# Altium PCB 电路板.PcbDoc
Units mil, origin at the board's own origin, x right, y up, seen from the top; angles counter-clockwise.
Board outline 1220.03 x 720.03 mil, 2 copper layers (Top Layer, Bottom Layer); 8 components, 7 nets, 28 pads, 5 vias.
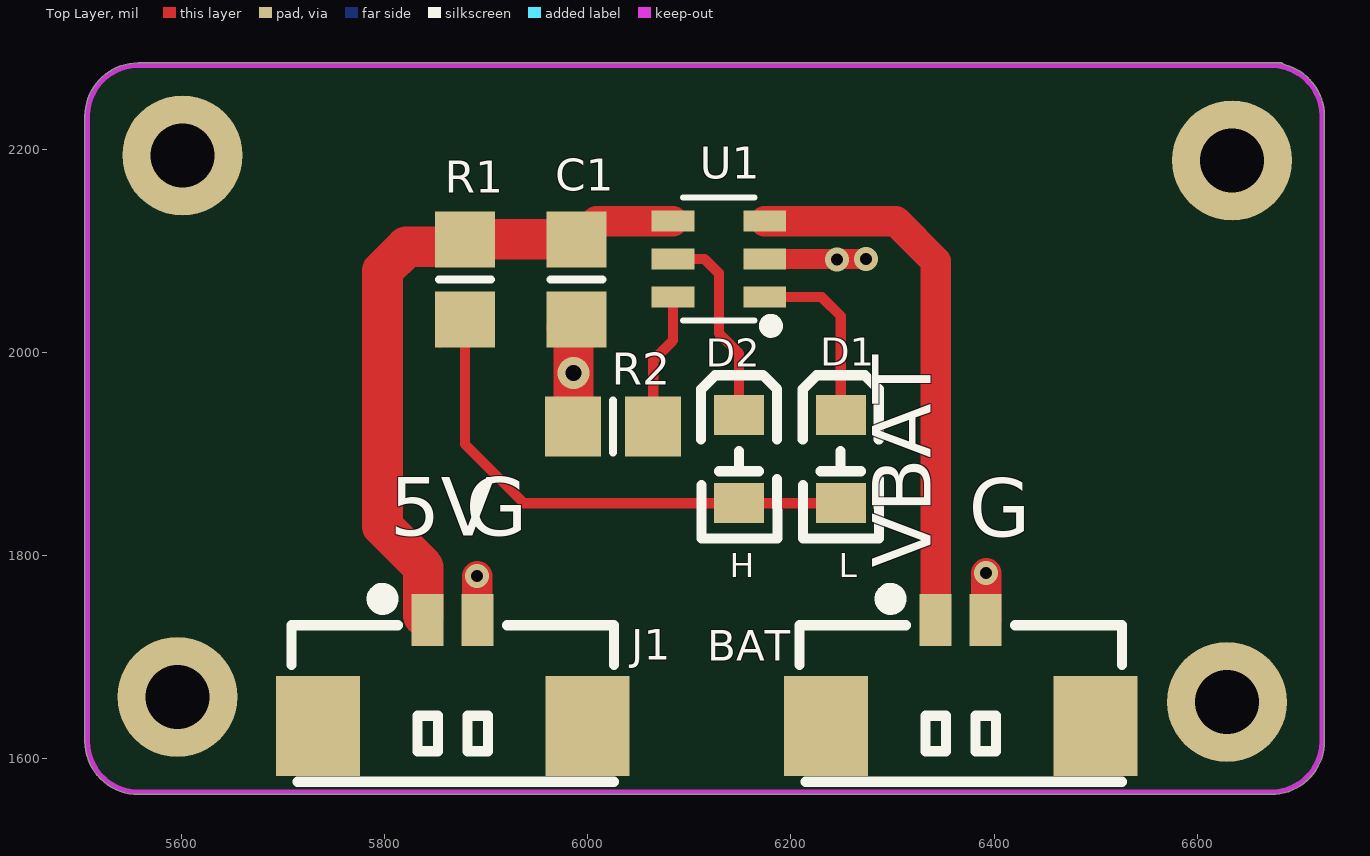
[diagram p0: Top Layer view]
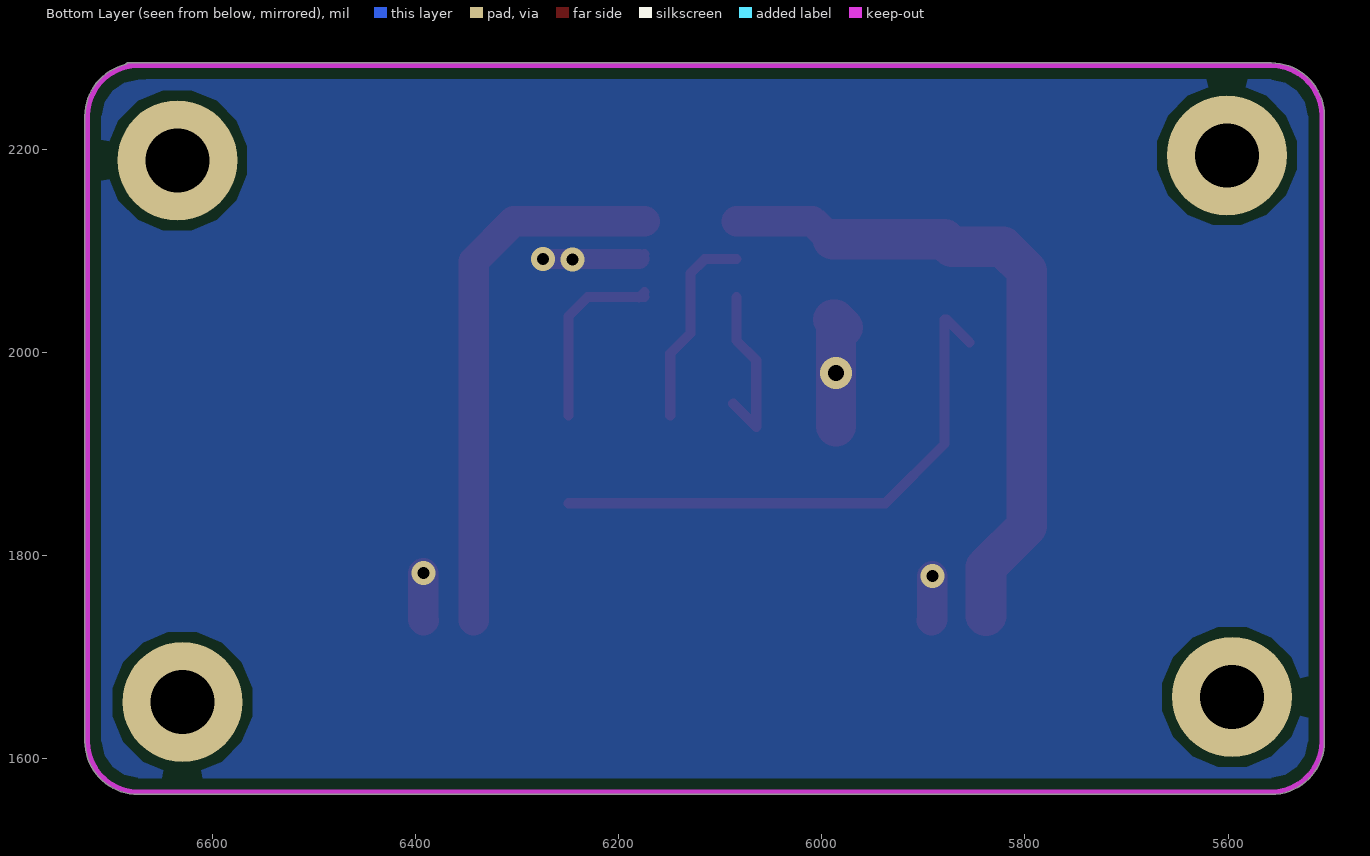
[diagram p1: Bottom Layer view, seen from below]

## Layer stack, top to bottom
Top Solder: solder mask 0.4, Solder Resist, Dk 3.5
Top Layer: signal copper 1.4
Dielectric 1: dielectric 12.6, FR-4, Dk 4.8
Bottom Layer: signal copper 1.4
Bottom Solder: solder mask 0.4, Solder Resist, Dk 3.5

## Board outline
5505.06,1617.58 ccw(c5557.57,1617.58) 5557.52,1565.06 ccw(c5557.55,1577.84) 5557.57,1565.06 cw(c5557.55,1567.4) 5557.52,1565.06 5557.57,1565.06 6672.57,1565.06 ccw(c6672.57,1617.57) 6725.09,1617.57 6725.09,2232.58 ccw(c6672.57,2232.58) 6684.84,2283.64 ccw(c6682.56,2282.57) 6682.56,2285.09 6667.51,2285.09 cw(c6667.57,2282.59) 6667.58,2285.09 6672.57,2285.09 cw(c6672.61,2243.58) 6672.86,2285.09 6672.64,2285.09 ccw(c6672.57,2282.59) 6672.57,2285.09 ccw(c6672.57,2283.1) 6672.51,2285.09 6667.64,2285.09 ccw(c6667.58,2282.59) 6667.58,2285.09 6667.51,2285.09 5557.59,2285.09 ccw(c5557.57,2282.56) 5557.57,2285.09 ccw(c5557.57,2232.58) 5505.06,2232.58

## Design rules (kind name [scope] priority, off if disabled: settings)
Clearance [All] p1: gap=10 ignorepadtopadclearanceinfootprint=FALSE except(0: Arc-Hole Track-Hole SMDPad-Hole THPad-Hole Via-Hole Fill-Hole Poly-Hole Region-Hole Text-Hole)
PolygonConnect [All] p1: connectstyle=Direct reliefconductorwidth=10 reliefentries=4 polygonreliefangle="90 Angle" airgapwidth=10
RoutingVias [All] p1: holewidth=28 width=50 viastyle="Through Hole" minholewidth=28 minwidth=50 maxholewidth=28 maxwidth=50
SolderMaskExpansion [All] p1: expansion=4 istentingtop=FALSE
Width [All] p1: maxlimit=118.11 minlimit=10 preferedwidth=10 minimp=50.000000 maximp=50.000000 favimp=50.000000
30 further rules are at their usual default settings.

## Classes and differential pairs
component class 5V电源板Sheet1: C1 D1 D2 R1 R2 U1

## Components (designator, comment, footprint, x,y, rotation, side; value= is the part's Value field where it differs from the comment)
BAT "MHDR1X2" "MX 1.25-LS-2P" 6367.57,1647.57 r0 top
C1 "" 6-0805_M 5989,2072 r90 top
D1 "" LED0805-RD_GREEN 6249,1895 r270 top
D2 "" LED0805-RD_GREEN 6149,1895 r270 top
J1 "Micro USB" "MX 1.25-LS-2P" 5867.57,1647.57 r0 top
R1 "1K" 6-0805_M 5879,2072 r270 top
R2 "2.2K" 6-0805_M 6025,1927 r0 top
U1 "9017" SOT-23-6_L2.9-W1.6-P0.95-LS2.8-BL 6129,2092 r90 top

## Footprints (in the part's own frame and the unit in brackets; to place one, negate y for a bottom-side part, rotate by r counter-clockwise, add the part's x,y. Pads: shape width x height; smd on the part's side, far side on the other; paste and mask are expansions set on the pad)
6-0805_M [mm] "Chip Resistor, Body 2.0x1.2mm, IPC Low Density"
  rect 1.4x1.5 smd: 1(-1,0) 2(1,0)
  silkscreen extent 0,-0.65 0,0.65, body extent -1.07,-0.7 1.07,0.7, height 0.7
LED0805-RD_GREEN [mm]
  rect 1x1.25 smd: 1(1.1,0) 2(-1.1,0)
  silkscreen extent -2.1,-0.95 1.98,0.96
"MX 1.25-LS-2P" [mm] "长：7.25m，宽：3"
  rect 2.1x2.5 smd: 0(-3.382,-0.381) 0(3.354,-0.381)
  rect 0.8x1.3 smd: 1(-0.639,2.261) 2(0.611,2.261)
  silkscreen extent -4.04,-1.78 4.02,2.99, body extent -3.83,-1.6 3.83,2.5, height 4.7
SOT-23-6_L2.9-W1.6-P0.95-LS2.8-BL [mil]
  rect 20.95x42.2 smd: 1(-37.4,-45.24) 2(0,-45.24) 3(37.4,-45.24) 4(37.4,45.24) 5(0,45.24) 6(-37.4,45.24)
  silkscreen extent -72,-57 61,35

## Part data
BAT J1: library part 1.25-2PWB
  BAT: LatestRevisionDate=17-Jul-2002, LatestRevisionNote="Re-released for DXP Platform.", Publisher="Altium Limited"
  J1: Contributor=nieqishuai, spicePre=J, spiceSymbolName="Micro USB"
C1: library part Cap, "Capacitor", Code_IEC=1005, Code_JEITA=0402, LatestRevisionDate=29-May-2009, LatestRevisionNote="IPC-7351 Footprint Added.", PackageDescription="Chip Inductor", PackageReference=0402-A, Published=8-Jun-2000, Publisher="Altium Limited"
D1 D2: library part LED1, "Typical RED GaAs LED", LatestRevisionDate=08-Jul-2005, LatestRevisionNote="Mech Layer 1 removed.", PackageDescription="LED; 2 Leads", PackageReference=LED-1, Published=8-Jun-2000, Publisher="Altium Limited"
R1 R2: library part Res1, "Resistor", LatestRevisionDate=17-Jul-2002, LatestRevisionNote="Re-released for DXP Platform.", PackageDescription="Axial Device, Thru-Hole; 2 Leads; 0.4 in Pin Spacing", PackageReference=AXIAL-0.4, Published=8-Jun-2000, Publisher="Altium Limited"
U1: library part 9017R

## Free pads (board coordinates)
  round 118.11 hole 62.99: 5(5596,1661) 5(5601,2194.16) 5(6629.15,1656) 5(6634.15,2189.15)

## Via types
v1: diameter 23.62, hole 11.81, Top Layer to Bottom Layer, 4 vias
v2: diameter 31.5, hole 15.75, Top Layer to Bottom Layer, 1 vias

## Nets (pads, with @x,y where several pads share a name; then routed paths per layer and width w, separated by ;. In a path a pad name is that pad's centre, name@x,y a point inside that pad or via, vN(x,y) a via of type N, cw(c..) or ccw(c..) an arc to the next point about the centre after c; other vN are vias at no path point)
GND: BAT.2 C1.1 J1.2 R2.1 U1.2 | length 312.2
  Top Layer w10: C1.1@5987.03,2032.63 C1.1 ; U1.2@6174.24,2097 U1.2@6179.24,2092
  Top Layer w19.68: U1.2@6179.24,2092 v1(6274,2092)
  Top Layer w30: v1(5891,1780) 5891,1737.21 J1.2 ; BAT.2 6392,1736.94 v1(6392,1783)
  Top Layer w39.37: C1.1@5979.16,2024.76 C1.1@5987.03,2032.63 ; R2.1 5986,1927.37 v2(5986,1980) 5986,2029.63 C1.1
  other v1: 6245.34,2091.52
NetD1_1: D1.1 D2.1 R1.2 | length 550.7
  Top Layer w10: R1.2@5854.47,2010.07 5877.03,2032.63 R1.2 5879,1910 5937.31,1851.69 D2.1 D1.1
NetD1_2: D1.2 U1.1 | length 187.9
  Top Layer w10: U1.1 U1.1@6179.24,2054.6 ; U1.1@6174.24,2059.6 U1.1@6179.24,2054.6 ; U1.1@6179.71,2054.13 U1.1@6179.24,2054.6 ; D1.2 6249,2036 6230.4,2054.6 U1.1@6179.24,2054.6
NetD2_2: D2.2 U1.5 | length 199
  Top Layer w10: U1.5 6115,2092 6129,2078 6129,2019 6149,1999 D2.2
NetL1_2: C1.2 J1.1 R1.1 U1.4 | length 662.4
  Top Layer w30: C1.2 5990.97,2111.37 6009,2129.4 U1.4
  Top Layer w40: J1.1@5838.17,1740.83 5838.17,1788.83 5798,1829 5798,2080.57 5821.43,2104 5871.63,2104 R1.1 C1.2
NetP1_1: BAT.1 U1.3 | length 537.9
  Top Layer w30: U1.3 6303,2129.4 6342.43,2089.97 BAT.1
NetR2_2: R2.2 U1.6 | length 167.5
  Top Layer w10: U1.6 6083.76,2011.76 6064.37,1992.37 R2.2 R2.2@6086.93,1949.56
pads on no net: BAT.0 J1.0

## Polygon pours and split planes (outlines as drawn)
GND on Bottom Layer "NONET_L-01_P-001" (solid, remove dead copper, pour order 0): 5538,2321 5482,2265 5482,1556 5524,1514 5547,1537 6699,1537 6769,1607 6768,1608 6768,2264 6709,2323

## Keep-outs
Keep-Out Layer:
  lines w5: 5557.57,1567.57 6672.57,1567.57 ccw(c6672.57,1617.57) 6722.57,1617.57 6722.57,1617.58 6722.57,2232.58 ccw(c6672.57,2232.58) 6672.57,2282.58 6667.58,2282.58 cw(c6667.57,2282.57) 6667.57,2282.57 ; 5557.57,1567.58 cw(c5557.57,1617.58) 5507.57,1617.58 5507.57,2232.58 cw(c5557.57,2232.58) 5557.57,2282.57 6682.56,2282.57

## Silkscreen, mask and mechanical layers (free items; w line width, h text height)
Top Overlay:
  text "5V" at 5805,1800.64 h98.43
  text "G" at 5880,1800.64 h98.43
  text "G" at 6375,1799.64 h98.43
  text "VBAT" at 6357,1788 h98.43 r90
  text "H" at 6139.87,1778.87 h23.62
  text "L" at 6246.87,1778.87 h23.62
Mechanical 1:
  lines w5: 5507,1621 ccw(c5559.77,1618.62) 5571,1567 ; 5507,2231 cw(c5559,2231) 5559,2283 ; 6669,1567 ccw(c6669.5,1620.5) 6723,1620 ; 6676,2283 cw(c6678,2238) 6723,2240
  lines w6: 5507,1621 5507,2231 ; 5559,2283 6676,2283 ; 5571,1567 6669,1567 ; 6723,1620 6723,2240